# Altium PCB SymphonyLights_MCU v1.0.PcbDoc
Units mm, origin at the board's own origin, x right, y up, seen from the top; angles counter-clockwise.
Board outline 68.58 x 53.34 mm, 2 copper layers (Top Layer, Bottom Layer); 62 components, 40 nets, 239 pads, 280 vias.
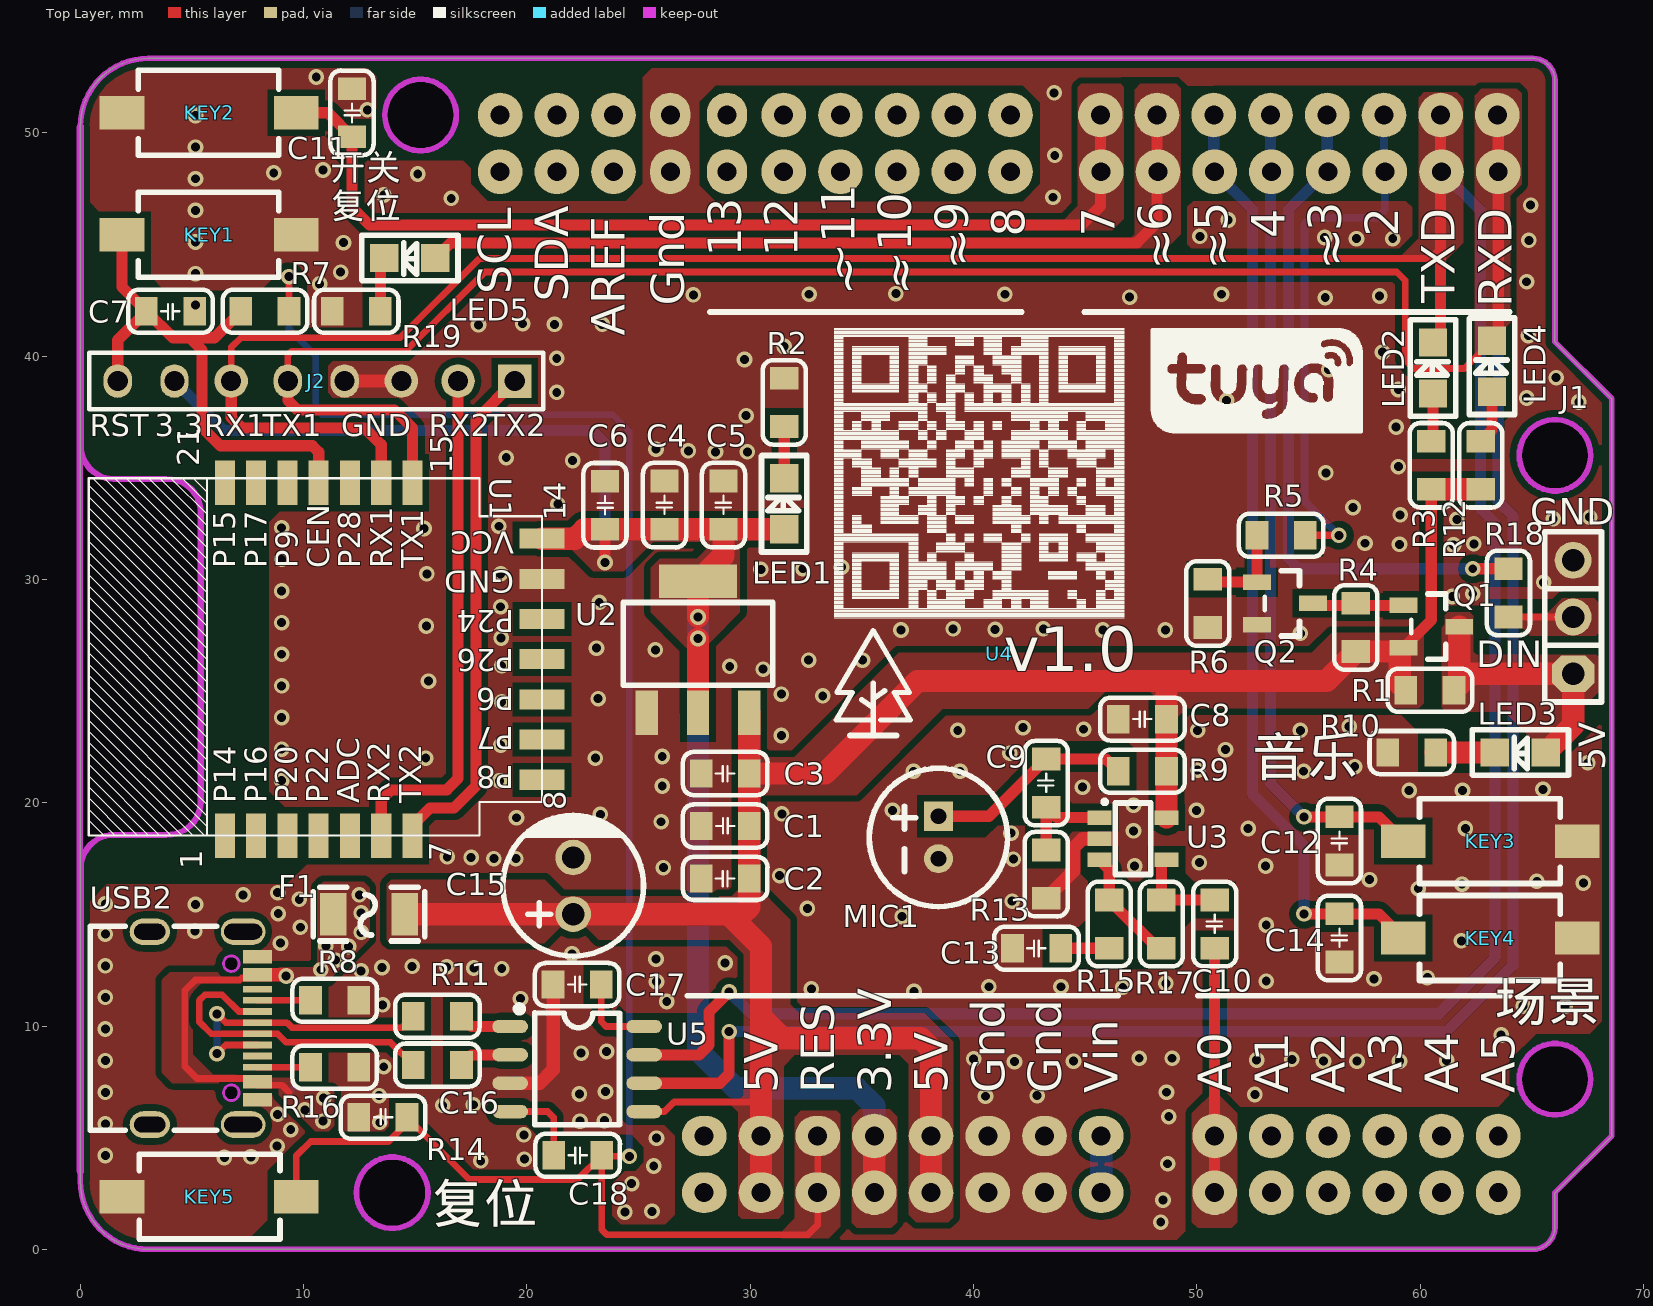
[diagram p0: Top Layer view]
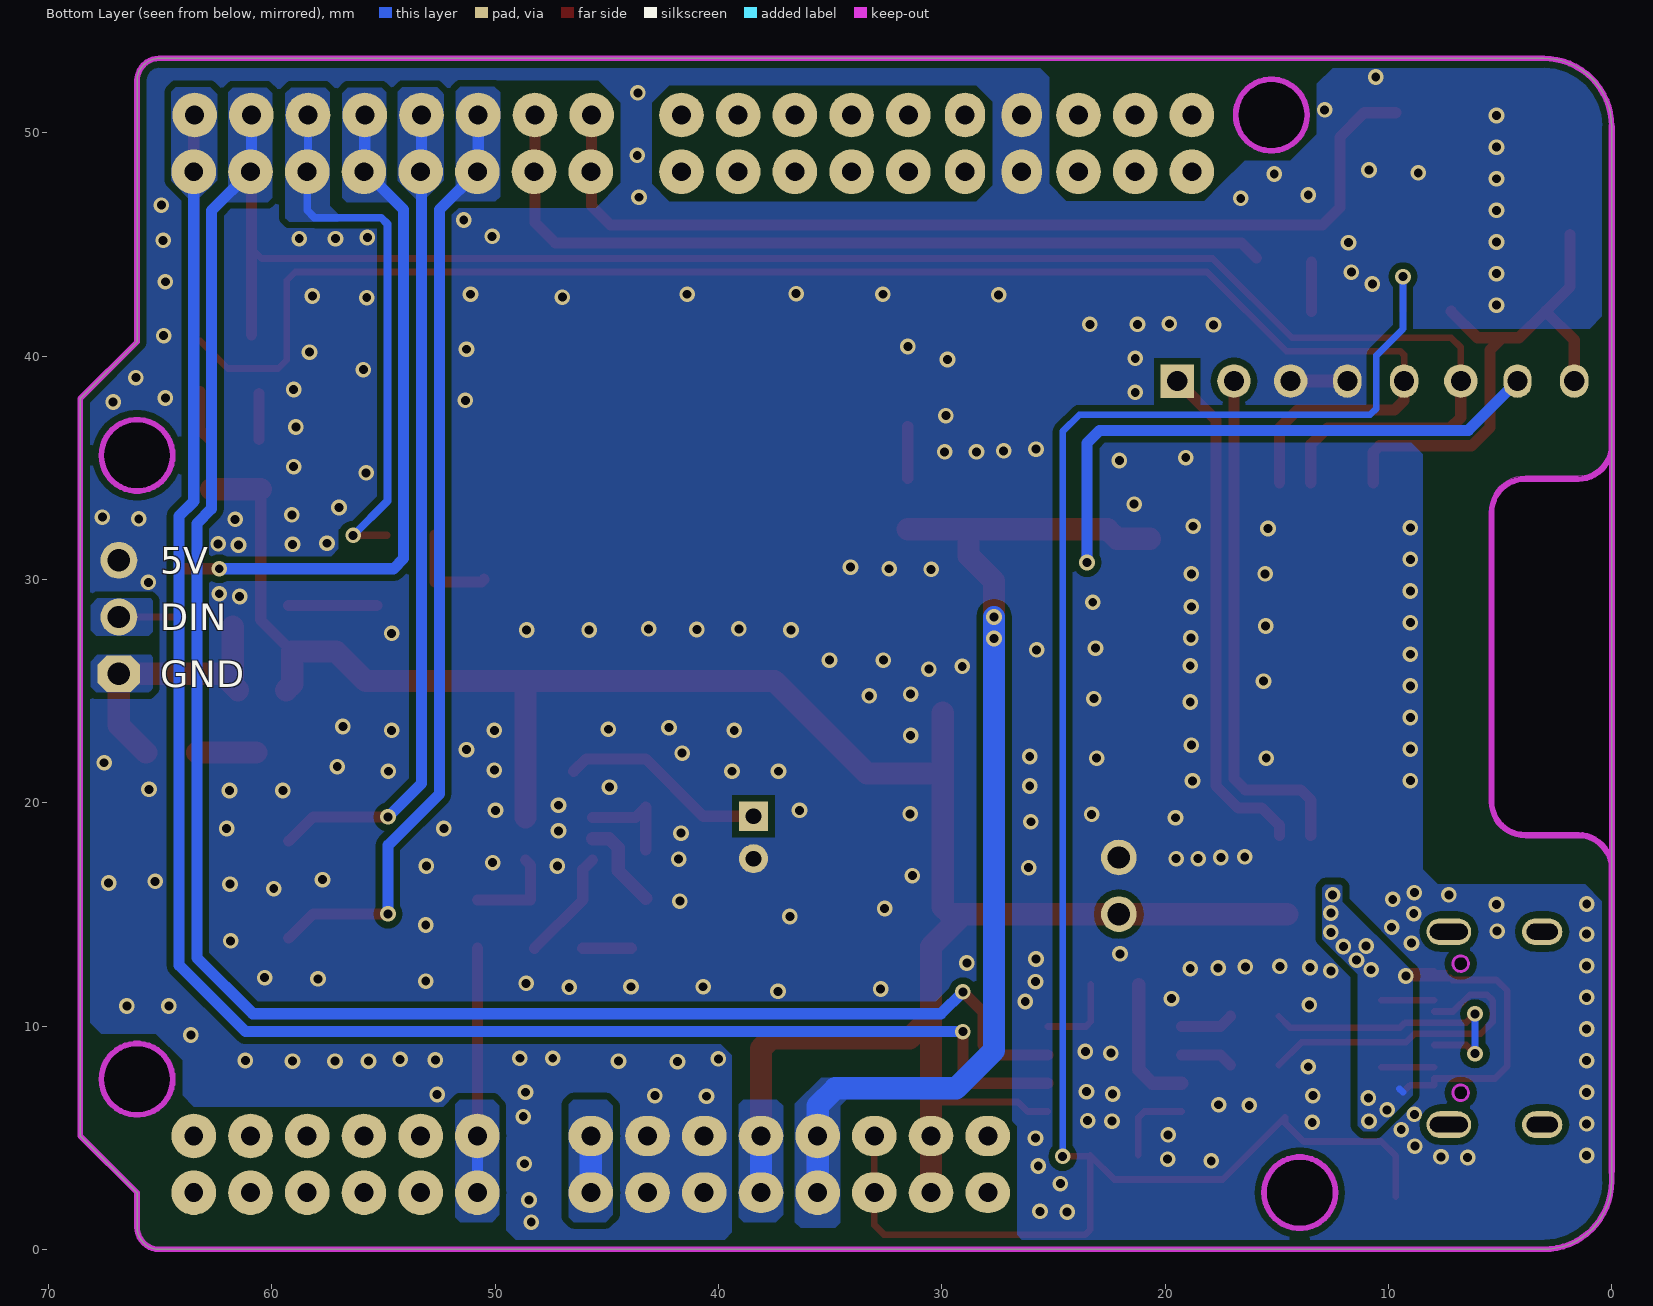
[diagram p1: Bottom Layer view, seen from below]

## Layer stack, top to bottom
Top Layer: signal copper 0.0356
Dielectric: dielectric 0.32, FR-4, Dk 4.8
Bottom Layer: signal copper 0.0356

## Board outline
0,3.048 0,50.292 cw(c3.048,50.292) 3.048,53.34 65.04,53.34 cw(c65.04,52.34) 66.04,52.34 66.04,40.64 68.58,38.1 68.58,5.08 66.04,2.54 66.04,1 cw(c65.04,1) 65.04,0 3.048,0 cw(c3.048,3.048)
cut-out: -0.127,17.065 cw(c1.497,17.069) -0.127,17.066 cw(c1.497,17.069) -0.127,17.071 -0.127,50.292 cw(c0,50.292) 0.127,50.292 0.127,36.008 cw(c0.001,35.996) 0.128,35.996 cw(c0.001,35.996) 0.128,35.996 ccw(c1.498,35.993) 1.503,34.623 ccw(c1.498,35.993) 1.504,34.623 3.873,34.623 cw(c3.88,32.999) 5.505,32.999 cw(c3.88,32.999) 5.505,32.996 cw(c3.88,32.999) 5.505,32.995 5.505,20.066 cw(c5.377,20.066) 5.504,20.054 cw(c3.88,20.063) 3.873,18.438 1.504,18.438 cw(c1.504,18.566) 1.502,18.438 cw(c1.497,17.069) 1.503,18.438 1.502,18.438 ccw(c1.497,17.069) 0.127,17.071 ccw(c1.497,17.069) 0.127,17.066 cw(c0,17.066) 0.127,17.066 0.127,3.48 cw(c0,3.48)

## Design rules (kind name [scope] priority, off if disabled: settings)
Clearance [All] p1: gap=0.3
ComponentClearance [All] p1: gap=0 collisioncheckmode=3 verticalgap=0 showdistances=FALSE
HoleSize [All] p1: absolutevalues=TRUE maxlimit=100 minlimit=0.025 maxpercent=80.000 minpercent=20.000
MinimumSolderMaskSliver [All] p1: minsoldermaskwidth=0
PolygonConnect [All] p1: connectstyle=Direct reliefconductorwidth=0.254 reliefentries=4 polygonreliefangle="90 Angle"
RoutingVias [All] p1: holewidth=0.711 width=1.27 viastyle="Through Hole" minholewidth=0.3 minwidth=0.6 maxholewidth=0.711 maxwidth=1.27
SilkToSilkClearance [All] p1: silktosilkclearance=0
SilkscreenOverComponentPads [All] p1: minsilkscreentomaskgap=0
SolderMaskExpansion [All] p1: expansion=0.102
Width [All] p1: maxlimit=2 minlimit=0.3 preferedwidth=0.3
23 further rules are at their usual default settings.

## Components (designator, comment, footprint, x,y, rotation, side; value= is the part's Value field where it differs from the comment)
C1 "100nF" 0805C 28.881,18.961 r0 top
C2 "22uF" 0805C 28.881,16.612 r180 top
C3 "100nF" 0805C 28.881,21.31 r180 top
C4 "100nF" 0805C 26.162,33.327 r90 top
C5 "22uF" 0805C 28.804,33.327 r90 top
C6 "100nF" 0805C 23.495,33.325 r270 top
C7 "100nF" 0805C 4.039,42.012 r180 top
C8 "1uF" 0805C 47.564,23.749 r180 top
C9 "1uF" 0805C 43.256,20.879 r90 top
C10 "0R" 0805C 50.8,14.567 r90 top
C11 "100nF" 0805C 12.167,50.9 r270 top
C12 "100nF" 0805C 56.388,18.289 r90 top
C13 "0R" 0805C 42.824,13.487 r180 top
C14 "100nF" 0805C 56.388,13.946 r90 top
C15 "100uF" CAP-TH_BD6.3-P2.50-D1.0-FD 22.073,16.281 r90 top
C16 "100nF" 0805C 13.551,5.918 r0 top
C17 "100nF" 0805C 22.25,11.862 r0 top
C18 "100nF" 0805C 22.276,4.216 r180 top
Designator2 "Comment" 二维码 644.855,437.667 r0 top
Designator3 "Comment" TUYA_LOGO_2 649.173,444.932 r0 top
F1 "0466005.NRHF" 1206F 12.929,15.011 r0 top
J1 "KF301-3P" "SIP3 - 2.54" 66.853,25.781 r90 top
J2 "CON8" HDR1X8Z 19.456,38.887 r180 top
KEY1 "RESET" 按键 5.766,45.441 r0 top
KEY2 "场景" 按键 5.766,50.902 r0 top
KEY3 "音乐" 按键 63.144,18.288 r0 top
KEY4 "开关" 按键 63.144,13.945 r0 top
KEY5 "开关" 按键 5.766,2.362 r180 top
LED1 "LED" 0805LED 31.521,32.248 r90 top
LED2 "LED" 0805LED 60.579,38.329 r90 top
LED3 "LED" 0805LED 65.634,22.25 r180 top
LED4 "LED" 0805LED 63.221,38.405 r90 top
LED5 "LED" 0805LED 15.9,44.399 r180 top
Logo "Comment" LOGO 630.453,434.061 r0 top
MIC1 "GMI6050P-66DB" MIC-TH_BD6.0-P1.90-D0.4-L-RD 38.43,18.447 r270 top
Q1 "SI2301" SOT-23(SOT-23-3) 60.503,27.889 r270 top
Q2 "S8050" SOT-23(SOT-23-3) 53.95,28.931 r270 top
R1 "0R NC" 0805R 59.36,25.044 r0 top
R2 "1K" 0805R 31.521,36.855 r90 top
R3 "1K" 0805R 60.503,34.036 r90 top
R4 "100K" 0805R 57.125,28.931 r270 top
R5 "1k" 0805R 54.859,31.979 r180 top
R6 "10K" 0805R 50.495,30.009 r270 top
R7 "0R" 0805R 7.188,42.012 r0 top
R8 "5.1K" 0805R 12.471,11.156 r180 top
R9 "10K" 0805R 48.644,21.412 r180 top
R10 "1K" 0805R 60.706,22.25 r180 top
R11 "22R" 0805R 17.069,10.439 r180 top
R12 "1K" 0805R 62.713,34.036 r90 top
R13 "1K" 0805R 43.256,15.723 r90 top
R14 "22R" 0805R 17.069,8.255 r180 top
R15 "1K" 0805R 46.076,13.487 r90 top
R16 "5.1K" 0805R 12.471,8.156 r180 top
R17 "100K" 0805R 48.412,13.487 r90 top
R18 "1K" 0805R 63.957,30.48 r270 top
R19 "1K" 0805R 13.437,42.012 r180 top
U1 "WIFI_BLE_CBU" WIFI_BLE_CBU 20.676,26.431 r90 top
U2 "AMS1117-3.3" SOT-223 27.661,26.975 r0 top
U3 "LM321" SOT-23-5 47.144,18.39 r0 top
U4 "Arduino Uno" "ARDUINO UNO-2" 0,0 r90 top locked
U5 "CH330N" SOP-8_L4.9-W3.9-P1.27-LS6.0-BL 22.25,8.077 r270 top
USB2 "KH-TYPE-C-16P" USB-C-SMD_KH-TYPE-C-16P 5.526,9.906 r270 top

## Footprints (in the part's own frame and the unit in brackets; to place one, negate y for a bottom-side part, rotate by r counter-clockwise, add the part's x,y. Pads: shape width x height; smd on the part's side, far side on the other; paste and mask are expansions set on the pad)
0805C [mil]
  rect 40x50 smd: 1(-42.5,0) 2(42.5,0)
  silkscreen extent -75,-38 75,38
0805LED [mil]
  rect 50x50 smd: 1(0,0) 2(90,0)
  silkscreen extent -40,-40 130,40
0805R [mil]
  rect 40x50 smd: 1(0,0) 2(85,0)
  silkscreen extent -32,-38 117,38
1206F [mm]
  rect 1.2x1.9 smd: 1(-1.6,0) 2(1.6,0)
  silkscreen extent -2.5,-1.2 2.5,1.2
"ARDUINO UNO-2" [mm]
  oval 1.8x2 hole 0.85: 1(2.54,-27.94) 1(5.08,-27.94) 2(2.54,-30.48) 2(5.08,-30.48) 3(2.54,-33.02) 3(5.08,-33.02) 5(2.54,-38.1) 5(5.08,-38.1) 6(2.54,-40.64) 6(5.08,-40.64) 7(2.54,-43.18) 7(5.08,-43.18) 8(2.54,-45.72) 8(5.08,-45.72)
  round 2 hole 0.85: 4(2.54,-35.56) 4(5.08,-35.56) 9(2.54,-50.8) 9(5.08,-50.8) 10(2.54,-53.34) 10(5.08,-53.34) 11(2.54,-55.88) 11(5.08,-55.88) 12(2.54,-58.42) 12(5.08,-58.42) 13(2.54,-60.96) 13(5.08,-60.96) 14(2.54,-63.5) 14(5.08,-63.5) 15(48.26,-63.5) 15(50.8,-63.46) 16(48.26,-60.96) 16(50.8,-60.92) 17(48.26,-58.42) 17(50.8,-58.38) 18(48.26,-55.88) 18(50.8,-55.84) 19(48.26,-53.34) 19(50.8,-53.3) 20(48.26,-50.8) 20(50.8,-50.76) 21(48.26,-48.26) 21(50.8,-48.22) 22(48.26,-45.72) 22(50.8,-45.68) 23(48.26,-41.66) 23(50.8,-41.66) 24(48.26,-39.12) 24(50.8,-39.12) 25(48.26,-36.58) 25(50.8,-36.58) 26(48.26,-34.04) 26(50.8,-34.04) 27(48.26,-31.5) 27(50.8,-31.5) 30(48.26,-23.88) 30(50.8,-23.88) 31(48.26,-21.34) 31(50.8,-21.34) 32(48.26,-18.8) 32(50.8,-18.8)
  oval 2x1.8 hole 0.85: 28(48.26,-28.96) 28(50.8,-28.96) 29(48.26,-26.42) 29(50.8,-26.42)
  Keep-Out Layer circle w0.254: c7.62,-66.04 r1.6
  Keep-Out Layer circle w0.254: c50.8,-15.24 r1.6
  Keep-Out Layer circle w0.254: c2.54,-13.97 r1.6
  Keep-Out Layer circle w0.254: c35.56,-66.04 r1.6
  Keep-Out Layer board cut-out: 33.952,-66.04 34.074,-66.652 34.421,-67.171 34.94,-67.518 35.552,-67.64 35.552,-67.64 36.165,-67.518 36.684,-67.171 37.03,-66.652 37.152,-66.04 37.152,-66.04 37.03,-65.428 36.684,-64.909 36.165,-64.562 35.552,-64.44 35.552,-64.44 34.94,-64.562 34.421,-64.909 34.074,-65.428 33.952,-66.04
  Keep-Out Layer board cut-out: 6.012,-66.04 6.134,-66.652 6.481,-67.171 7,-67.518 7.612,-67.64 7.612,-67.64 8.225,-67.518 8.744,-67.171 9.09,-66.652 9.212,-66.04 9.212,-66.04 9.09,-65.428 8.744,-64.909 8.225,-64.562 7.612,-64.44 7.612,-64.44 7,-64.562 6.481,-64.909 6.134,-65.428 6.012,-66.04
  Keep-Out Layer board cut-out: 0.932,-13.97 1.054,-14.582 1.401,-15.101 1.92,-15.448 2.532,-15.57 2.532,-15.57 3.145,-15.448 3.664,-15.101 4.01,-14.582 4.132,-13.97 4.132,-13.97 4.01,-13.358 3.664,-12.839 3.145,-12.492 2.532,-12.37 2.532,-12.37 1.92,-12.492 1.401,-12.839 1.054,-13.358 0.932,-13.97
  Keep-Out Layer board cut-out: 49.192,-15.24 49.314,-15.852 49.661,-16.371 50.18,-16.718 50.792,-16.84 50.792,-16.84 51.405,-16.718 51.924,-16.371 52.27,-15.852 52.392,-15.24 52.392,-15.24 52.27,-14.628 51.924,-14.109 51.405,-13.762 50.792,-13.64 50.792,-13.64 50.18,-13.762 49.661,-14.109 49.314,-14.628 49.192,-15.24
  Keep-Out Layer lines w0.254: 3.048,0 ccw(c3.048,-3.048) 0,-3.048 0,-65.04 ccw(c1,-65.04) 1,-66.04 2.54,-66.04 5.08,-68.58 38.1,-68.58 40.64,-66.04 52.34,-66.04 ccw(c52.34,-65.04) 53.34,-65.04 53.34,-3.048 ccw(c50.292,-3.048) 50.292,0 3.48,0 3.048,0
  silkscreen extent 11.36,-64.01 41.98,-27.18
CAP-TH_BD6.3-P2.50-D1.0-FD [mm]
  round 1.6 hole 1: 1(-1.27,0) 2(1.27,0)
  silkscreen extent -3.15,-3.15 3.17,3.15
HDR1X8Z [mm] "Connector; Header; 8 Position"
  rect 1.5x1.5 hole 0.9: 1(0,0)
  round 1.5 hole 0.9: 2(2.54,0) 3(5.08,0) 6(12.7,0)
  oval 1.27x1.5 hole 0.9: 4(7.62,0) 5(10.16,0) 7(15.24,0) 8(17.78,0)
  silkscreen extent -1.27,-1.27 19.05,1.27
LOGO [mm]
  silkscreen extent -596.61,-411.05 -593.28,-406.35
MIC-TH_BD6.0-P1.90-D0.4-L-RD [mm]
  rect 1.3x1.3 hole 0.7: 1(-0.95,0)
  round 1.3 hole 0.7: 2(0.95,0)
  silkscreen extent -3.1,-3.1 3.1,3.1
"SIP3 - 2.54" [mil]
  oct 65x75 hole 39.37: 1(0,0)
  round 65 hole 39.37: 2(100,0) 3(200,0)
  silkscreen extent -50,-50 250,50
SOP-8_L4.9-W3.9-P1.27-LS6.0-BL [mm]
  oval 0.6x1.598 smd: 1(-1.905,-3) 2(-0.635,-3) 3(0.635,-3) 4(1.905,-3) 5(1.905,3) 6(0.635,3) 7(-0.635,3) 8(-1.905,3)
  silkscreen extent -2.84,-2.74 2.5,1.9
SOT-23(SOT-23-3) [mm]
  rect 0.7x1.25 smd: 1(-0.95,-1.25) 2(0.95,-1.25) 3(0,1.25)
  silkscreen extent -1.46,-0.9 1.46,0.65
SOT-23-5 [mm]
  rect 1.06x0.65 smd: 1(-1.5,0.95) 2(-1.5,0) 3(-1.5,-0.95) 4(1.5,-0.95) 5(1.5,0.95)
  silkscreen extent -1.33,-1.6 0.8,1.71
SOT-223 [mm]
  rect 1x2 smd: 1(-2.3,-2.95) 2(0,-2.95) 3(2.3,-2.95)
  rect 3.5x1.5 smd: 2(0,2.95)
  silkscreen extent -3.35,-1.71 3.35,1.99
TUYA_LOGO_2 [mm]
  silkscreen extent -601.24,-408.37 -591.74,-403.67
USB-C-SMD_KH-TYPE-C-16P [mm]
  oval 1.2x2 hole 0.7 slot 1.7 at 90 deg: 1(-4.32,1.765) 2(4.32,1.765)
  oval 1.2x1.8 hole 0.7 slot 1.4 at 90 deg: 3(-4.32,-2.415) 4(4.32,-2.415)
  rect 0.3x1.3 smd: A1(-3.35,2.415) A4(-2.55,2.415) A5(-1.25,2.415) A6(-0.25,2.415) A7(0.25,2.415) A8(1.25,2.415) A9(2.55,2.415) A12(3.35,2.415) B1(3.05,2.415) B4(2.25,2.415) B5(1.75,2.415) B6(0.75,2.415) B7(-0.75,2.415) B8(-1.75,2.415) B9(-2.25,2.415) B12(-3.05,2.415)
  round 0.7 hole 0.7 unplated: ""(-2.89,1.235) ""(2.89,1.235)
  Keep-Out Layer circle w0.127: c-2.89,1.235 r0.35
  Keep-Out Layer circle w0.127: c2.89,1.235 r0.35
  silkscreen extent -4.57,-5.08 4.57,0.57
WIFI_BLE_CBU [mm]
  rect 2x0.9 smd: 1(-7.9,14.2) 2(-7.9,12.8) 3(-7.9,11.4) 4(-7.9,10) 5(-7.9,8.6) 6(-7.9,7.2) 7(-7.9,5.8) 15(7.9,5.8) 16(7.9,7.2) 17(7.9,8.6) 18(7.9,10) 19(7.9,11.4) 20(7.9,12.8) 21(7.9,14.2)
  rect 0.9x2 smd: 8(-5.4,0) 9(-3.6,0) 10(-1.8,0) 11(0,0) 12(1.8,0) 13(3.6,0) 14(5.4,0)
  silkscreen extent -7.9,0 8.14,20.33
二维码 [mm]
  silkscreen extent -611.1,-409.37 -598.09,-396.42
按键 [mm] "SW-SMD1"
  rect 2x1.5 smd: 1(-3.9,0) 2(3.9,0)
  silkscreen extent -3.17,-1.9 3.13,1.9

## Part data
C2 C3 C4 C5: library part CAP, "Capacitor"
C8 C9 C10 C13: library part 100nF
C15: library part 8101LCMAA08E2RR00O
C17: library part Cap, "普通电容"
J1: library part CON3, "Connector"
J2: "Connector"
R1 R4 R5 R6: library part Res2, "Resistor"
R2 R3 R10 R12 R18 R19: library part RES5
R7 R8 R11 R13 R14 R15 R16 R17: library part 10K
U1: "Module"
U2: library part GM1117

## Via types
v1: diameter 0.7, hole 0.4, Top Layer to Bottom Layer, tented both sides, 280 vias

## Nets (pads, with @x,y where several pads share a name; then routed paths per layer and width w, separated by ;. In a path a pad name is that pad's centre, name@x,y a point inside that pad or via, vN(x,y) a via of type N, cw(c..) or ccw(c..) an arc to the next point about the centre after c; other vN are vias at no path point)
3V3: C4.1 C5.1 C6.2 J2.7 LED1.1 U1.14 U2.2 U4.4 | length 80.8
  Top Layer w0.5: v1(23.495,30.759) C6.2
  Top Layer w1: U1.14 22.153,31.831 22.571,32.248 C4.1 C5.1 ; U2.2@27.661,24.025 v1(27.661,27.356) ; v1(27.661,28.321) 27.661,29.925 28.804,31.068 C5.1 ; LED1.1 C5.1 ; U4.4@35.56,2.54 U4.4@35.56,5.08
  Bottom Layer w0.5: J2.7 6.426,36.678 22.936,36.678 23.495,36.119 v1(23.495,30.759)
  Bottom Layer w1: v1(27.661,28.321) v1(27.661,27.356) 27.661,8.915 29.362,7.214 34.773,7.214 35.56,6.426 35.56,5.08 U4.4@35.56,2.54
5V: C1.2 C2.1 C3.1 C8.1 C15.1 F1.2 Q1.2 R1.1 R3.1 R4.2 R9.1 R12.1 U2.3 U3.5 U4.2 U4.5 U5.5 | length 109.1
  Top Layer w0.3: U5.5 26.162,6.172 26.594,6.604 30.15,6.604 30.48,6.274
  Top Layer w0.5: Q1.2 60.503,28.189 R3.1
  Top Layer w1: F1.2 29.032,15.012 ; U2.3 C3.1 ; U4.2@30.48,2.54 30.48,5.08 30.48,6.274 30.48,10.414 ; U4.5@38.1,2.54 38.1,5.08 38.1,8.992 37.643,9.449 31.445,9.449 30.48,10.414 ; U3.5 R9.1 C8.1 48.644,25.352 ; R1.1 59.085,25.319 59.085,26.772 R4.2 55.804,25.451 37.49,25.451 33.35,21.31 C3.1 ; R3.1 R12.1 ; 29.032,15.012 29.642,15.012 29.961,15.33 C2.1 C1.2 C3.1 ; 29.032,15.012 30.48,13.564 30.48,10.414
  Bottom Layer w1: U4.5@38.1,2.54 U4.5@38.1,5.08
D+: R11.2 USB2.A6 USB2.B6 | length 13
  Top Layer w0.3: v1(6.121,8.763) 6.514,9.156 USB2.B6 ; v1(6.121,10.549) 6.514,10.156 USB2.A6 9.25,10.156 9.474,9.931 14.402,9.931 R11.2
  Bottom Layer w0.3: v1(6.121,8.763) v1(6.121,10.549)
D-: R14.2 USB2.A7 USB2.B7 | length 14.4
  Top Layer w0.3: USB2.B7 7.099,10.656 6.35,11.405 5.588,11.405 5.321,11.138 5.321,10.198 5.863,9.656 USB2.A7 8.835,9.656 9.22,9.271 13.894,9.271 R14.2
DIN_5V: R18.1 U4.18 | length 30.6
  Top Layer w0.5: v1(62.357,30.48) R18.1
  Bottom Layer w0.5: U4.18@55.84,50.8 55.84,48.3 54.1,46.56 54.1,30.937 54.557,30.48 v1(62.357,30.48)
GND: C1.1 C2.2 C3.2 C4.2 C5.2 C6.1 C7.1 C8.2 C11.1 C12.1 C13.2 C14.1 C15.2 C16.1 C17.1 J1.3 J2.3 J2.4 KEY1.2 KEY2.1 KEY3.2 KEY4.2 KEY5.2 MIC1.2 Q2.2 R2.2 R6.2 R8.1 R10.2 R13.1 R16.1 R19.2 U1.13 U2.1 U3.2 U4.6 U4.7 U4.29 U5.3 USB2.A1 USB2.A12 USB2.B1 USB2.B12 | length 12.6
  Top Layer w0.6: J2.4 J2.3 ; U5.3 20.574,7.442 21.171,8.039 C17.1 ; R13.1 44.491,16.958 44.491,17.991 44.89,18.39 U3.2
  other v1: 48.387,1.219 24.384,1.676 25.603,1.702 48.489,2.21 24.689,2.946 25.679,3.734 48.692,3.835 17.932,3.962 19.888,4.039 6.452,4.115 7.645,4.14 1.119,4.203 8.814,4.623 25.806,4.978 19.863,5.131 9.423,5.359 1.119,5.619 13.411,5.69 22.377,5.74 23.47,5.766 48.743,5.944 8.839,6.045 16.231,6.452 17.602,6.477 40.538,6.858 13.386,6.883 42.85,6.883 52.603,6.934 22.352,6.96 1.119,7.035 48.641,7.036 23.52,7.061 13.589,8.179 41.834,8.407 44.475,8.433 55.677,8.433 57.175,8.433 59.08,8.433 1.119,8.451 61.189,8.458 52.68,8.484 54.254,8.509 40.005,8.534 47.422,8.56 48.895,8.56 22.428,8.788 23.571,8.865 63.627,9.601 1.119,9.867 64.618,10.897 66.497,10.897 13.538,10.947 26.264,11.1 19.71,11.227 1.119,11.283 37.338,11.557 32.741,11.659 46.685,11.735 40.691,11.76 43.917,11.76 48.616,11.913 25.806,11.989 53.111,12.014 57.937,12.116 60.325,12.167 12.573,12.471 18.872,12.573 17.628,12.598 13.513,12.624 16.408,12.649 14.859,12.675 1.119,12.699 28.88,12.827 25.781,13.005 22.022,13.233 8.966,13.716 61.849,13.818 1.119,14.115 5.131,14.249 9.855,14.427 53.111,14.529 36.805,14.91 8.865,15.037 32.563,15.265 5.156,15.443 1.118,15.469 41.732,15.596 9.804,15.672 7.29,15.875 8.839,15.977 59.919,16.154 61.874,16.358 67.31,16.408 65.227,16.485 57.734,16.561 31.318,16.739 26.111,17.094 47.219,17.17 53.086,17.17 50.114,17.323 41.783,17.475 18.517,17.501 19.507,17.501 17.501,17.551 16.434,17.577 41.681,18.644 47.168,18.745 52.299,18.847 62.027,18.847 26.01,19.152 19.533,19.329 23.292,19.482 31.42,19.507 36.373,19.66 49.987,19.66 47.168,19.888 59.512,20.549 61.9,20.549 65.507,20.599 44.882,20.701 26.06,20.752 9.017,20.988 18.771,20.98 37.313,21.412 39.395,21.412 54.788,21.412 50.038,21.463 57.074,21.615 67.513,21.793 15.469,21.996 23.063,21.996 26.06,22.073 41.631,22.225 51.283,22.377 9.017,22.405 18.821,22.581 31.394,23.012 39.294,23.241 50.038,23.241 54.635,23.241 44.933,23.292 42.215,23.368 56.82,23.419 9.017,23.821 18.872,24.511 23.19,24.663 33.249,24.79 31.394,24.867 9.017,25.237 15.596,25.451 30.582,25.984 29.083,26.111 18.872,26.137 32.614,26.391 35.027,26.391 9.017,26.653 25.756,26.848 23.114,26.924 18.847,27.381 54.635,27.584 36.754,27.737 45.796,27.737 48.59,27.737 40.97,27.762 39.091,27.788 43.129,27.788 15.494,27.915 9.017,28.069 18.821,28.778 23.241,28.981 61.443,29.235 62.357,29.362 9.017,29.485 65.532,29.87 15.519,30.251 18.821,30.251 30.48,30.455 32.36,30.48 34.087,30.556 9.017,30.901 61.493,31.547 59.08,31.572 62.408,31.598 57.531,31.623 15.392,32.283 9.017,32.317 18.745,32.385 61.646,32.69 65.964,32.715 67.589,32.791 59.106,32.893 56.998,33.223 21.387,33.376 55.778,34.773 59.03,35.052 22.047,35.331 19.075,35.458 28.448,35.712 29.87,35.712 27.229,35.763 25.781,35.839 58.928,36.83 29.82,37.338 67.107,37.948 51.333,38.024 64.77,38.125 21.336,38.379 59.03,38.506 66.091,39.04 55.905,39.395 29.743,39.853 21.336,39.903 58.318,40.183 51.283,40.31 31.521,40.437 64.846,40.919 17.831,41.402 21.234,41.427 23.368,41.427 19.812,41.453 5.158,42.284 55.753,42.621 46.99,42.647 58.191,42.697 27.457,42.748 32.639,42.774 41.402,42.774 51.105,42.774 36.525,42.799 10.719,43.231 64.77,43.332 5.158,43.7 11.659,43.764 11.786,45.085 5.158,45.116 64.872,45.187 57.15,45.263 58.776,45.263 55.728,45.314 50.14,45.364 51.41,46.101 5.158,46.532 64.948,46.761 16.612,47.066 43.561,47.117 13.589,47.219 5.158,47.948 15.113,48.158 8.661,48.209 10.871,48.336 43.637,48.997 5.158,49.364 5.158,50.78 12.852,51.029 43.612,51.791 10.566,52.502
MIC: C10.1 U4.9 | length 13.5
  Top Layer w0.5: U4.9@50.8,2.54 50.8,5.08 C10.1
  Bottom Layer w0.5: U4.9@50.8,2.54 U4.9@50.8,5.08
NetC9_1: C9.1 R13.2 U3.1 | length 4.5
  Top Layer w0.5: R13.2 C9.1 43.716,19.34 U3.1
NetC9_2: C9.2 MIC1.1 R9.2 | length 9.3
  Top Layer w0.5: MIC1.1 40.695,19.397 C9.2 45.938,21.958 R9.2
NetC10_2: C10.2 R17.2 U3.4 | length 4.3
  Top Layer w0.5: U3.4 48.412,17.208 R17.2 C10.2
NetC13_1: C13.1 R15.1 | length 2.2
  Top Layer w0.5: C13.1 R15.1
NetC17_2: C17.2 U5.8 | length 3.7
  Top Layer w0.3: C17.2 23.33,10.198 23.546,9.982 U5.8
NetC18_2: C18.2 U5.4 | length 3.7
  Top Layer w0.3: U5.4 20.93,6.172 21.196,5.905 C18.2
NetJ1_2: J1.2 R18.2 | length 2.9
  Top Layer w0.3: R18.2 J1.2
NetLED1_2: LED1.2 R2.1 | length 2.3
  Top Layer w0.5: LED1.2 R2.1
NetLED2_1: LED2.1 R3.2 | length 2.1
  Top Layer w0.5: R3.2@60.579,36.271 LED2.1
NetLED3_2: LED3.2 R10.1 | length 2.6
  Top Layer w1: R10.1 LED3.2
NetLED4_1: LED4.1 R12.2 | length 2.4
  Top Layer w0.5: R12.2 63.221,36.703 LED4.1
NetLED5_2: LED5.2 R19.1 | length 2.2
  Top Layer w0.5: R19.1 LED5.2@13.437,44.221
NetQ1_1: Q1.1 Q2.3 R4.1 | length 4
  Top Layer w0.5: Q2.3@55.291,28.839 Q1.1
NetQ2_1: Q2.1 R5.2 R6.1 | length 4.4
  Top Layer w0.5: R6.1 50.623,29.881 Q2.1 R5.2
NetR8_2: R8.2 USB2.A5 | length 2.4
  Top Layer w0.3: USB2.A5 R8.2
NetR11_1: R11.1 U5.1 | length 2.4
  Top Layer w0.5: R11.1 17.526,9.982 U5.1
NetR14_1: R14.1 U5.2 | length 2.4
  Top Layer w0.5: R14.1 17.526,8.712 U5.2
NetR15_2: R15.2 R17.1 U3.3 | length 5
  Top Layer w0.5: U3.3 46.076,17.008 R15.2 R17.1@48.235,13.487
NetR16_2: R16.2 USB2.B5 | length 2.4
  Top Layer w0.3: USB2.B5 R16.2
OUT_5V: J1.1 LED3.1 Q1.3 R1.2 | length 12.3
  Top Layer w1: R1.2 R1.2@61.752,25.278 ; Q1.3 R1.2@61.752,25.278 ; LED3.1 66.853,23.47 J1.1 62.255,25.781 R1.2@61.752,25.278
P6: C11.2 KEY2.2 U4.22 | length 44.4
  Top Layer w0.5: KEY2.2 11.086,50.902 C11.2 12.167,46.66 12.954,45.872 44.831,45.872 45.68,46.721 U4.22@45.68,50.8
P7: C12.2 KEY3.1 U4.19 | length 36.9
  Top Layer w0.5: v1(54.802,19.369) C12.2 58.164,19.369 KEY3.1
  Bottom Layer w0.5: U4.19@53.3,50.8 53.3,20.871 v1(54.802,19.369)
P8: C14.2 KEY4.1 U4.20 | length 42.3
  Top Layer w0.5: v1(54.802,15.025) C14.2 58.164,15.025 KEY4.1
  Bottom Layer w0.5: U4.20@50.76,50.8 50.76,48.3 50.8,48.26 52.5,46.56 52.5,20.398 54.802,18.096 v1(54.802,15.025)
POWER: R5.1 U4.17 | length 24.2
  Top Layer w0.35: R5.1 v1(56.363,31.979)
  Bottom Layer w0.35: v1(56.363,31.979) 54.825,33.516 54.825,45.923 55.104,46.203 58.09,46.203 58.42,46.533 U4.17@58.42,48.26 ; U4.17@58.38,48.26 U4.17@58.38,50.8
RESET: C16.2 C18.1 KEY5.1 R7.2 U4.3 | length 91.3
  Top Layer w0.3: R7.2 v1(9.347,43.561) ; KEY5.1 9.666,4.179 10.32,4.833 13.799,4.833 14.63,5.664 C16.2 17.417,3.131 22.27,3.131 C18.1 23.355,0.876 23.571,0.66 32.588,0.66 33.02,1.092 33.02,2.54 U4.3@33.02,5.08 ; C18.1@23.406,4.166 v1(24.587,4.166)
  Bottom Layer w0.3: v1(9.347,43.561) 9.347,41.224 10.541,40.03 10.541,37.657 10.82,37.378 23.227,37.378 23.836,37.378 24.587,36.627 v1(24.587,4.166)
RST: C7.2 J2.8 KEY1.1 R7.1 U1.18 | length 24
  Top Layer w0.5: J2.8 1.676,40.729 C7.2 ; KEY1.1 1.866,43.105 C7.2 ; R7.1 6.003,40.827 4.902,40.827 ; U1.18 10.676,35.705 10.393,35.987 6.278,35.987 5.456,36.809 5.456,40.272 4.902,40.827 ; C7.2 4.144,40.827 4.902,40.827
RX2: J2.2 U1.6 | length 23.2
  Top Layer w0.5: U1.6 13.476,20.13 13.919,20.574 16.408,20.574 16.916,21.082 J2.2
TX2: J2.1 U1.7 | length 22.9
  Top Layer w0.5: U1.7 14.876,18.99 15.659,19.774 16.74,19.774 17.716,20.751 17.716,37.147 J2.1
USB_5V: F1.1 USB2.A4 USB2.A9 USB2.B4 USB2.B9 | length 13.6
  Top Layer w0.3: 7.137,12.065 5.156,12.065 4.674,11.582 4.674,8.204 5.222,7.656 USB2.B4 USB2.A9 9.027,7.356 9.347,7.036 ; 7.228,12.156 USB2.B9 ; USB2.A4 v1@9.256,12.456
  Bottom Layer w0.3: 9.347,7.036 9.5,7.188
  other v1: 10.871,5.74 10.058,6.248 10.897,6.782 9.22,12.243 10.77,12.522 11.43,12.954 12.014,13.564 10.998,13.589 12.573,14.199 12.573,15.062 12.497,15.875
VIN: U4.8 | length 2.5
  Bottom Layer w1: U4.8@45.72,2.54 U4.8@45.72,5.08
WIFI: LED5.1 U4.21 | length 37.8
  Top Layer w0.5: LED5.1 16.574,45.072 47.308,45.072 48.22,45.985 U4.21@48.22,50.8
WRX: J2.6 LED2.2 U1.16 U4.16 U5.7 | length 158.2
  Top Layer w0.3: J2.6 6.756,40.386 7.197,40.827 14.324,40.827 17.87,44.372 60.461,44.372 60.92,44.831
  Top Layer w0.5: J2.6 6.756,37.262 7.231,36.787 12.731,36.787 13.476,36.043 U1.16 ; U5.7 27.711,8.712 28.158,9.158 28.158,10.632 v1(29.058,11.532) ; LED2.2@60.92,40.956 60.92,44.831 U4.16@60.92,50.8
  Bottom Layer w0.5: v1(29.058,11.532) 30.036,10.554 60.857,10.554 63.36,13.057 63.36,32.511 62.7,33.171 62.7,46.52 U4.16@60.96,48.26 ; U4.16@60.92,48.3 U4.16@60.92,50.8
WTX: J2.5 LED4.2 U1.15 U4.15 U5.6 | length 158.2
  Top Layer w0.3: J2.5 9.296,40.056 9.467,40.227 14.573,40.227 18.118,43.772 58.953,43.772 59.334,43.391 59.334,39.827 59.715,39.446 61.976,39.446 LED4.2
  Top Layer w0.5: J2.5 9.296,38.024 9.733,37.587 14.067,37.587 14.876,36.779 U1.15 ; U5.6 28.651,7.442 29.058,7.849 v1(29.058,9.754) ; LED4.2@63.5,40.97 63.5,48.26 U4.15@63.5,50.76
  Bottom Layer w0.5: v1(29.058,9.754) 61.189,9.754 64.16,12.725 64.16,32.842 63.5,33.503 U4.15@63.5,48.26
pads on no net: U1.1 U1.2 U1.3 U1.4 U1.5 U1.8 U1.9 U1.10 U1.11 U1.12 U1.17 U1.19 U1.20 U1.21 U4.1 U4.10 U4.11 U4.12 U4.13 U4.14 U4.23 U4.24 U4.25 U4.26 U4.27 U4.28 U4.30 U4.31 U4.32 USB2. USB2.1 USB2.2 USB2.3 USB2.4 USB2.A8 USB2.B8

## Polygon pours and split planes (outlines as drawn)
GND on Top Layer "Mechanical 15-No Net" (solid, remove dead copper): 0,3.048 0,50.292 cw(c3.048,50.292) 3.048,53.34 65.04,53.34 cw(c65.04,52.34) 66.04,52.34 66.04,40.64 68.58,38.1 68.58,5.08 66.04,2.54 66.04,1 cw(c65.04,1) 65.04,0 3.048,0 cw(c3.048,3.048)
MIC on Top Layer "Bottom Layer-No Net" (solid): 51.816,1.219 51.562,0.965 50.038,0.965 49.784,1.219 49.784,6.096 50.8,7.112 51.816,6.096 51.816,1.219
NetJ1_2 on Top Layer "Bottom Layer-No Net" (solid): 68.021,27.635 67.869,27.483 67.839,27.483 64.928,27.483 64.811,27.6 64.414,27.997 64.414,28.321 65.532,28.321 66.37,29.159 67.793,29.159 68.021,28.931
USB_5V on Top Layer "Bottom Layer-No Net" (solid): 9.22,7.823 9.855,7.188 11.252,7.188 11.379,7.061 11.379,5.537 11.125,5.283 10.531,5.283 8.372,7.442 4.115,7.442 3.658,7.899 3.658,12.065 4.013,12.421 7.087,12.421 7.29,12.624 10.389,12.624 10.617,12.852 10.617,16.205 10.871,16.459 12.7,16.459 12.954,16.205 12.954,13.894 11.049,11.989 5.486,11.989 5.029,11.532 5.029,8.738 5.944,7.823
WIFI on Top Layer "Bottom Layer-No Net" (solid): 47.473,52.197 47.219,51.943 47.219,51.079 47.219,45.453 46.838,45.072 47.079,44.831 47.828,44.831 48.641,44.831 48.92,45.11 49.276,45.466 49.276,48.235 49.276,51.994 49.124,52.146 49.073,52.197 47.473,52.197
P6 on Top Layer "Bottom Layer-No Net" (solid): 44.679,46.736 43.815,45.872 44.069,45.618 46.203,45.618 46.736,46.152 46.736,52.045 46.584,52.197 44.831,52.197 44.679,52.045
WTX on Top Layer "Bottom Layer-No Net" (solid): 62.459,50.8 62.459,39.929 62.419,39.89 64.033,41.504 64.033,41.758 64.033,47.193 64.541,47.701 64.541,51.765 64.338,51.968 62.738,51.968 62.509,51.74 62.459,51.689 62.459,50.8
WRX on Top Layer "Bottom Layer-No Net" (solid): 60.96,51.816 61.646,51.816 61.849,51.613 61.925,51.537 61.925,50.546 61.925,45.074 60.92,44.069 60.92,43.891 60.59,44.221 60.046,44.221 60.123,44.221 59.972,44.372 59.03,44.372 59.919,45.261 59.944,45.287 59.944,48.743 59.944,51.587 60.02,51.664 60.173,51.816 60.96,51.816
OUT_5V on Top Layer "Bottom Layer-No Net" (solid): 61.112,27.991 61.112,28.397 61.239,28.524 62.23,28.524 62.382,28.372 62.382,26.772 62.535,26.619 67.081,26.619 67.894,26.619 68.123,26.391 68.123,25.095 67.005,23.978 65.71,22.682 65.176,22.682 63.779,24.079 61.29,24.079 61.163,24.079 60.96,24.282 60.96,27.838 61.112,27.991
3V3 on Top Layer "Bottom Layer-No Net" (solid): 34.544,5.08 34.544,5.918 34.9,6.274 36.246,6.274 36.5,6.02 36.576,5.944 36.576,4.013 36.576,1.219 36.322,0.965 34.773,0.965 34.544,1.194 34.544,5.08
RESET on Top Layer "Bottom Layer-No Net" (solid): 32.004,5.055 32.004,1.397 31.267,0.66 31.42,0.508 33.528,0.508 34.036,1.016 34.036,2.108 34.036,6.045 33.884,6.198 32.258,6.198 32.029,5.969 32.004,5.944 32.004,5.055
3V3 on Top Layer "Bottom Layer-No Net" (solid): 27.661,26.518 27.661,26.645 28.245,27.229 29.54,28.524 29.54,29.769 29.54,31.486 30.302,32.248 21.753,32.248 21.336,31.831 21.509,31.831 22.504,30.836 22.962,30.378 24.333,30.378 25.654,31.699 26.873,31.699 27.915,31.699 28.143,31.471 27.61,30.937 26.06,30.937 25.959,30.937 25.552,30.531 25.552,28.524 27.661,26.416
5V on Top Layer "Bottom Layer-No Net" (solid): 29.82,19.609 30.556,20.345 31.623,20.345 34.773,20.345 38.633,24.206 45.136,24.206 46.38,25.451 47.447,25.451 48.412,24.486 48.644,24.254 48.644,23.343 49.533,24.232 52.756,24.232 59.944,24.232 60.173,24.46 60.173,27.838 60.147,27.864 59.893,27.61 56.032,27.61 55.143,26.721 44.501,26.721 36.652,26.721 31.979,22.047 30.734,22.047 29.794,22.987 29.794,19.775 29.961,19.609
5V on Top Layer "Bottom Layer-No Net" (solid): 22.098,15.824 21.539,15.824 20.803,16.561 13.919,16.561 13.716,16.358 13.716,13.868 13.868,13.716 20.777,13.716 22.073,15.011 23.216,13.868 26.949,13.868 29.058,13.868 29.718,13.208 29.718,6.934 29.388,6.604 29.007,6.604 29.464,6.147 29.464,4.75 29.464,1.524 29.616,1.372 31.267,1.372 31.42,1.524 31.496,1.6 31.496,3.683 31.496,8.204 32.004,8.712 36.678,8.712 37.109,8.28 37.109,4.902 37.109,1.549 37.44,1.219 38.862,1.219 39.091,1.448 39.091,9.296 37.821,10.566 32.207,10.566 31.801,10.973 31.801,14.771 29.961,16.612 29.173,15.824 22.098,15.824
GND on Bottom Layer "Mechanical 15-No Net" (solid, remove dead copper): 0,3.048 0,50.292 cw(c3.048,50.292) 3.048,53.34 65.04,53.34 cw(c65.04,52.34) 66.04,52.34 66.04,40.64 68.58,38.1 68.58,5.08 66.04,2.54 66.04,1 cw(c65.04,1) 65.04,0 3.048,0 cw(c3.048,3.048)
USB_5V on Bottom Layer "Bottom Layer-No Net" (solid): 8.915,12.344 8.915,12.421 9.144,12.649 12.065,15.57 12.065,16.053 12.065,16.256 12.141,16.332 12.827,16.332 12.865,16.294 12.954,16.205 12.954,13.894 11.379,12.319 11.379,5.537 11.125,5.283 10.531,5.283 8.915,6.899
OUT_5V on Bottom Layer "Bottom Layer-No Net" (solid): 67.869,24.943 68.123,25.197 68.123,26.314 67.818,26.619 67.793,26.619 65.43,26.619 65.329,26.518 65.329,25.121 65.43,25.019 65.507,24.943 67.869,24.943
NetJ1_2 on Bottom Layer "Bottom Layer-No Net" (solid): 67.869,27.483 68.123,27.737 68.123,28.854 67.818,29.159 67.793,29.159 65.43,29.159 65.329,29.058 65.329,27.661 65.43,27.559 65.507,27.483 67.869,27.483
WTX on Bottom Layer "Bottom Layer-No Net" (solid): 62.459,50.775 62.459,47.879 63.297,47.041 63.46,46.878 63.54,46.878 64.516,47.854 64.516,48.362 64.516,51.841 64.313,52.045 62.763,52.045 62.56,51.841 62.459,51.74 62.459,50.775
WRX on Bottom Layer "Bottom Layer-No Net" (solid): 61.965,47.255 62.321,46.899 60.187,46.899 59.984,47.102 59.984,51.776 60.238,52.03 61.762,52.03 61.965,51.827
POWER on Bottom Layer "Bottom Layer-No Net" (solid): 57.415,51.827 57.415,46.747 56.871,46.203 57.048,46.025 58.395,46.025 59.233,46.025 59.309,46.101 59.396,46.188 59.396,47.102 59.396,51.776 59.142,52.03 57.618,52.03 57.415,51.827
DIN_5V on Bottom Layer "Bottom Layer-No Net" (solid): 54.875,47.255 54.519,46.899 56.653,46.899 56.856,47.102 56.856,51.776 56.602,52.03 55.078,52.03 54.875,51.827
P8 on Bottom Layer "Bottom Layer-No Net" (solid): 51.765,47.295 52.121,46.939 49.987,46.939 49.784,47.142 49.784,51.816 50.038,52.07 51.562,52.07 51.765,51.867
P7 on Bottom Layer "Bottom Layer-No Net" (solid): 52.299,50.775 52.299,47.879 53.137,47.041 53.3,46.878 53.38,46.878 54.356,47.854 54.356,48.362 54.356,51.841 54.153,52.045 52.603,52.045 52.4,51.841 52.299,51.74 52.299,50.775
MIC on Bottom Layer "Bottom Layer-No Net" (solid): 49.809,1.549 50.14,1.219 51.562,1.219 51.791,1.448 51.791,1.549 51.791,6.502 51.587,6.706 50.089,6.706 49.809,6.426 49.809,1.549
VIN on Bottom Layer "Bottom Layer-No Net" (solid): 44.729,1.549 45.06,1.219 46.482,1.219 46.711,1.448 46.711,1.549 46.711,6.502 46.507,6.706 45.009,6.706 44.729,6.426 44.729,1.549
5V on Bottom Layer "Bottom Layer-No Net" (solid): 37.109,1.549 37.44,1.219 38.862,1.219 39.091,1.448 39.091,1.549 39.091,6.502 38.887,6.706 37.389,6.706 37.109,6.426 37.109,1.549
3V3 on Bottom Layer "Bottom Layer-No Net" (solid): 32.614,7.214 33.757,7.214 34.544,6.426 34.544,1.194 34.773,0.965 36.322,0.965 36.576,1.219 36.576,5.944 36.576,6.528 35.408,7.696 33.325,7.696 33.096,7.468

## Keep-outs
Keep-Out Layer:
  lines w0.254: 0,17.066 cw(c1.497,17.069) 1.504,18.566 3.873,18.566 ccw(c3.88,20.063) 5.377,20.066 5.377,32.996 ccw(c3.88,32.999) 3.874,34.496 1.504,34.496 cw(c1.498,35.993) 0.001,35.996

## Other copper
Top Layer:
  rectangle net USB_5V: 7.345,11.989 9.504,12.506
  pour cut-out: 10.966,49.852 11.232,49.586 11.232,49.013 11.735,48.51 11.735,48.158 12.247,48.158 12.852,48.763 17.15,48.763 17.577,48.336 20.584,51.343 25.191,51.343 25.191,52.496 25.806,53.111 14.072,53.111 13.242,52.282 13.242,50.769 13.102,50.629 11.743,50.629
  pour cut-out: 10.135,17.231 9.246,16.358 1.194,16.358 0.33,15.494 0.33,46.99 0.83,46.491 3.166,46.491 3.166,43.548 3.767,42.947 8.077,42.947 8.692,43.561 10.003,43.561 10.155,43.409 10.155,41.285 12.629,41.285 12.629,45.487 12.929,45.187 12.979,45.187 12.979,40.709 12.497,40.227 11.753,40.227 11.1,39.573 11.1,38.354 11.43,38.024 11.43,35.535 8.458,32.563 8.458,20.523 10.135,18.847
  pour cut-out: 16.261,9.504 16.261,9.19 17.251,9.19 17.251,9.504
  pour cut-out: 15.718,9.504 15.718,9.19 15.63,9.277 14.536,9.277 14.763,9.504
  pour cut-out: 24.14,5.919 24.498,5.56 26.149,5.56 26.63,5.08 26.63,1.56 26.162,1.092 24.232,1.092 23.814,1.51 23.814,2.932 24.392,3.51 24.859,3.51 25.243,3.894 25.243,4.577 24.668,5.151 21.655,5.151 20.93,5.877 20.93,6.452 20.641,6.452 19.749,5.56 19.979,5.56 20.388,5.151 20.388,3.53 19.99,3.131 17.417,3.131 15.73,4.819 9.656,4.819 8.366,3.528 8.366,1.312 7.358,0.305 29.489,0.305 29.134,0.66 29.134,5.461 28.473,6.121 28.473,10.566 28.27,10.77 28.095,10.594 24.471,10.594 24.138,10.927 23.774,10.563 23.774,9.677 24.14,9.312
  pour cut-out: 51.953,6.391 51.816,6.529 51.816,1.219 51.562,0.965 50.038,0.965 49.772,1.232 49.478,1.232 49.478,0.812 48.971,0.305 65.354,0.305 65.862,0.813 65.862,2.565 68.453,5.156 68.453,9.093 68.301,9.246 68.301,10.363 67.594,9.657 65.196,9.657 64.003,8.464 64.003,6.894 63.5,6.391
  pour cut-out: 44.814,16.815 45.141,16.488 45.141,14.851 44.712,14.422 44.712,12.552 49.22,12.552 49.347,12.679 49.347,14.321 49.865,14.838 49.865,16.454 49.474,16.846 49.474,18.065 47.814,18.065 47.814,16.815 47.453,16.454 47.011,16.454 46.65,16.815
  pour cut-out: 42.321,19 41.087,19 40.533,18.447 39.38,18.447 39.38,20.347 40.852,20.347 43.271,22.766 46.873,22.766 47.293,22.347 47.293,20.477 45.677,20.477 45.677,21.398 44.191,21.398 44.191,20.198 44.424,19.965 46.474,19.965 46.474,18.715 44.445,18.715 44.145,18.415 44.145,17.12 44.191,17.074 42.321,17.074
  pour cut-out: 59.898,23.185 59.055,24.028 58.674,24.028 58.725,24.079 63.779,24.079 64.999,22.86 64.999,21.615 65.024,21.59 66.345,21.59 66.396,21.641 66.396,22.149 67.539,23.292 67.539,24.308 67.894,24.663 68.174,24.663 68.377,24.46 68.377,23.852 66.569,22.044 66.569,21.315 59.898,21.315
  pour cut-out: 62.23,28.83 62.688,28.372 62.688,26.925 67.794,26.925 68.224,27.356 67.966,27.356 67.839,27.483 64.928,27.483 64.751,27.661 63.322,27.661 63.17,27.813 63.17,28.88 63.271,28.981 64.691,28.981 64.821,28.851 64.821,28.651 65.176,28.651 65.202,28.677 65.659,28.677 66.12,29.138 68.152,29.138 68.301,29.286 68.301,29.82 68.25,29.87 67.844,29.465 66.244,29.465 65.907,29.129 63.022,29.129 62.723,28.83 62.23,28.83
  pour cut-out: 59.568,37.003 59.568,38.945 59.01,39.503 62.681,39.503 62.934,39.756 64.156,39.756 64.156,37.47 63.781,37.096 63.781,36.703 63.648,36.569 63.648,35.387 61.184,35.387
  pour cut-out: 44.831,52.503 49.2,52.503 49.592,52.111 62.448,52.111 62.459,52.122 62.459,51.689 61.773,51.689 61.646,51.816 60.173,51.816 59.944,51.587 59.944,46.711 59.766,46.533 59.35,46.949 49.844,46.949 49.479,46.584 49.479,45.569 49.582,45.466 49.582,45.008 49.86,44.729 49.022,44.729 48.87,44.882 48.87,45.06 49.263,45.453 49.263,52.006 49.073,52.197 44.831,52.197
  pour cut-out: 24.423,52.111 25.191,51.343 25.191,47.717 24.423,46.949 18.257,46.949 17.489,47.717 17.489,51.343 18.257,52.111
  pour cut-out: 41.659,52.11 41.66,52.111 42.203,52.111 42.971,51.343 42.971,47.717 42.203,46.949 28.46,46.949 27.75,47.659 27.75,51.401 28.459,52.11
Bottom Layer:
  pour cut-out: 16.442,48.763 17.489,47.717 17.489,51.343 18.257,52.111 24.423,52.111 25.191,51.343 25.191,52.496 25.806,53.111 12.446,53.111 12.37,53.035 13.209,52.196 13.209,49.95 14.396,48.763
  pour cut-out: 0.435,15.599 1.194,16.358 7.798,16.358 8.458,17.018 8.458,35.604 10.205,37.35 10.082,37.473 10.082,40.03 8.888,41.224 0.991,41.224 0.152,42.062
  pour cut-out: 56.93,32.306 57.018,32.219 57.018,31.374 57.379,31.013 54.817,31.013 54.661,31.169 54.661,33.068 55.309,33.717 56.748,32.279 56.942,32.279
  pour cut-out: 44.369,47.757 45.492,46.633 49.987,46.633 49.987,46.939 49.784,47.142 49.784,51.816 50.038,52.07 49.921,52.187 49.921,52.353 45.378,52.353 44.369,51.343
  pour cut-out: 41.659,52.11 41.66,52.111 42.203,52.111 42.971,51.343 42.971,47.717 42.203,46.949 28.46,46.949 27.75,47.659 27.75,51.401 28.459,52.11
  pour cut-out: 24.423,52.111 25.191,51.343 25.191,47.717 24.423,46.949 18.257,46.949 17.489,47.717 17.489,51.343 18.257,52.111
  pour cut-out: 65.023,29.058 65.023,25.426 65.329,25.121 65.329,26.518 65.43,26.619 67.818,26.619 68.123,26.314 68.123,27.229 67.869,27.483 65.507,27.483 65.329,27.661 65.329,28.752 65.023,29.058
  pour cut-out: 52.334,6.391 51.804,6.922 51.804,1.038 50.015,1.038 49.504,1.549 49.504,0.863 48.997,0.356 65.557,0.356 65.837,0.635 65.837,2.464 68.428,5.055 68.428,10.439 67.645,9.657 65.196,9.657 64.003,8.464 64.003,6.894 63.5,6.391
  pour cut-out: 26.854,8.915 26.854,5.747 26.63,5.523 26.63,0.645 26.34,0.356 40.056,0.356 40.081,0.381 39.776,0.381 39.396,0.761 39.396,8.688 39.903,9.195 27.133,9.195
Multi-Layer:
  pour cut-out: 13.242,52.282 13.242,52.544 12.7,53.086 13.792,53.086 14.021,52.857 13.818,52.857

## Silkscreen, mask and mechanical layers (free items; w line width, h text height)
Top Overlay:
  text "开关" at 11.201,47.523 h2
  text "复位" at 11.201,45.796 h2
  text "RST" at 0.42,36.424 h1
  text "3.3" at 3.326,36.424 h1
  text "RX1" at 5.557,36.424 h1
  text "TX1" at 8.161,36.424 h1
  text "GND" at 11.695,36.424 h1
  text "RX2" at 15.598,36.424 h1
  text "TX2" at 18.202,36.424 h1
  text "GND" at 64.922,32.461 h1.2
  text "DIN" at 62.509,26.06 h1.2
  text "v1.0" at 41.355,25.883 h2
  text "5V" at 68.301,21.463 h1.2 r90
  text "音乐" at 52.502,20.625 h3
  text "场景" at 63.348,9.652 h3
  text "复位" at 15.697,0.635 h3
Bottom Overlay:
  text "5V" at 64.999,30.261 h1.2
  text "DIN" at 64.999,27.721 h1.2
  text "GND" at 64.999,25.181 h1.2

## Dimensions
0,50.292 to 68.58,38.1 on Top Overlay
3.048,0 to 3.048,53.34 on Top Overlay

## Text inside footprints (layer, text, board x,y; h text height)
U1: Top Overlay "P15" at 6.934,30.496 h1 r90; Top Overlay "P17" at 8.353,30.496 h1 r90; Top Overlay "P9" at 9.74,30.496 h1 r90; Top Overlay "CEN" at 11.143,30.496 h1 r90; Top Overlay "P28" at 12.545,30.496 h1 r90; Top Overlay "RX1" at 13.964,30.496 h1 r90; Top Overlay "TX1" at 15.367,30.496 h1 r90; Top Overlay "GND" at 19.431,30.393 h1 r180; Top Overlay "VCC" at 19.43,32.146 h1 r180; Top Overlay "TX2" at 15.265,19.979 h1 r90; Top Overlay "RX2" at 13.867,19.979 h1 r90; Top Overlay "ADC" at 12.485,19.979 h1 r90; Top Overlay "P22" at 11.102,19.979 h1 r90; Top Overlay "P20" at 9.72,19.979 h1 r90; Top Overlay "P16" at 8.354,19.979 h1 r90; Top Overlay "P14" at 6.956,19.979 h1 r90; Top Overlay "21" at 5.334,35.067 h1 r90; Top Overlay "1" at 5.456,17.031 h1 r90; Top Overlay "P24" at 19.431,28.624 h1 r180; Top Overlay "P26" at 19.431,26.872 h1 r180; Top Overlay "P6" at 19.431,25.124 h1 r180; Top Overlay "P7" at 19.431,23.383 h1 r180; Top Overlay "P8" at 19.431,21.63 h1 r180; Top Overlay "7" at 16.606,17.386 h1 r90; Top Overlay "8" at 21.742,19.674 h1 r90; Top Overlay "14" at 21.742,32.628 h1 r90; Top Overlay "15" at 16.662,34.737 h1 r90
U4: Top Overlay "SDA" at 21.844,42.434 h1.5 r90; Top Overlay "SCL" at 19.304,42.777 h1.5 r90; Top Overlay "AREF" at 24.384,40.906 h1.5 r90; Top Overlay "RES" at 33.77,6.985 h1.5 r90; Top Overlay "3.3V" at 36.31,6.985 h1.5 r90; Top Overlay "5V" at 38.85,6.985 h1.5 r90; Top Overlay "Gnd" at 41.39,6.985 h1.5 r90; Top Overlay "Gnd" at 43.93,6.985 h1.5 r90; Top Overlay "Vin" at 46.47,6.985 h1.5 r90; Top Overlay "A0" at 51.55,6.985 h1.5 r90; Top Overlay "A1" at 54.09,6.985 h1.5 r90; Top Overlay "A2" at 56.63,6.985 h1.5 r90; Top Overlay "A3" at 59.17,6.985 h1.5 r90; Top Overlay "A4" at 61.71,6.985 h1.5 r90; Top Overlay "A5" at 64.25,6.985 h1.5 r90; Top Overlay "TXD" at 61.555,42.377 h1.5 r90; Top Overlay "RXD" at 64.095,42.184 h1.5 r90; Top Overlay "2" at 59.015,45.355 h1.5 r90; Top Overlay "~3" at 56.475,43.877 h1.5 r90; Top Overlay "4" at 53.935,45.284 h1.5 r90; Top Overlay "~5" at 51.395,43.877 h1.5 r90; Top Overlay "~6" at 48.855,43.877 h1.5 r90; Top Overlay "7" at 46.315,45.355 h1.5 r90; Top Overlay "8" at 42.295,45.355 h1.5 r90; Top Overlay "~9" at 39.755,43.877 h1.5 r90; Top Overlay "~10" at 37.215,42.977 h1.5 r90; Top Overlay "~11" at 34.675,43.334 h1.5 r90; Top Overlay "12" at 32.135,44.455 h1.5 r90; Top Overlay "13" at 29.595,44.455 h1.5 r90; Top Overlay "Gnd" at 27.055,42.256 h1.5 r90; Top Overlay "5V" at 31.23,6.985 h1.5 r90; Top Overlay "~" at 40.137,43.993 h1.52 r90; Top Overlay "~" at 37.597,42.723 h1.52 r90; Top Overlay "~" at 35.057,42.723 h1.52 r90; Top Overlay "~" at 56.897,43.993 h1.52 r90; Top Overlay "~" at 51.817,43.993 h1.52 r90; Top Overlay "~" at 49.277,43.993 h1.52 r90